# Altium PCB project_buran.PcbDoc
Units mm, origin at the board's own origin, x right, y up, seen from the top; angles counter-clockwise.
Board outline 120 x 100 mm, 2 copper layers (Top Layer, Bottom Layer); 35 components, 51 nets, 202 pads, 0 vias.
Unrouted connection lines stored in the file: 123.
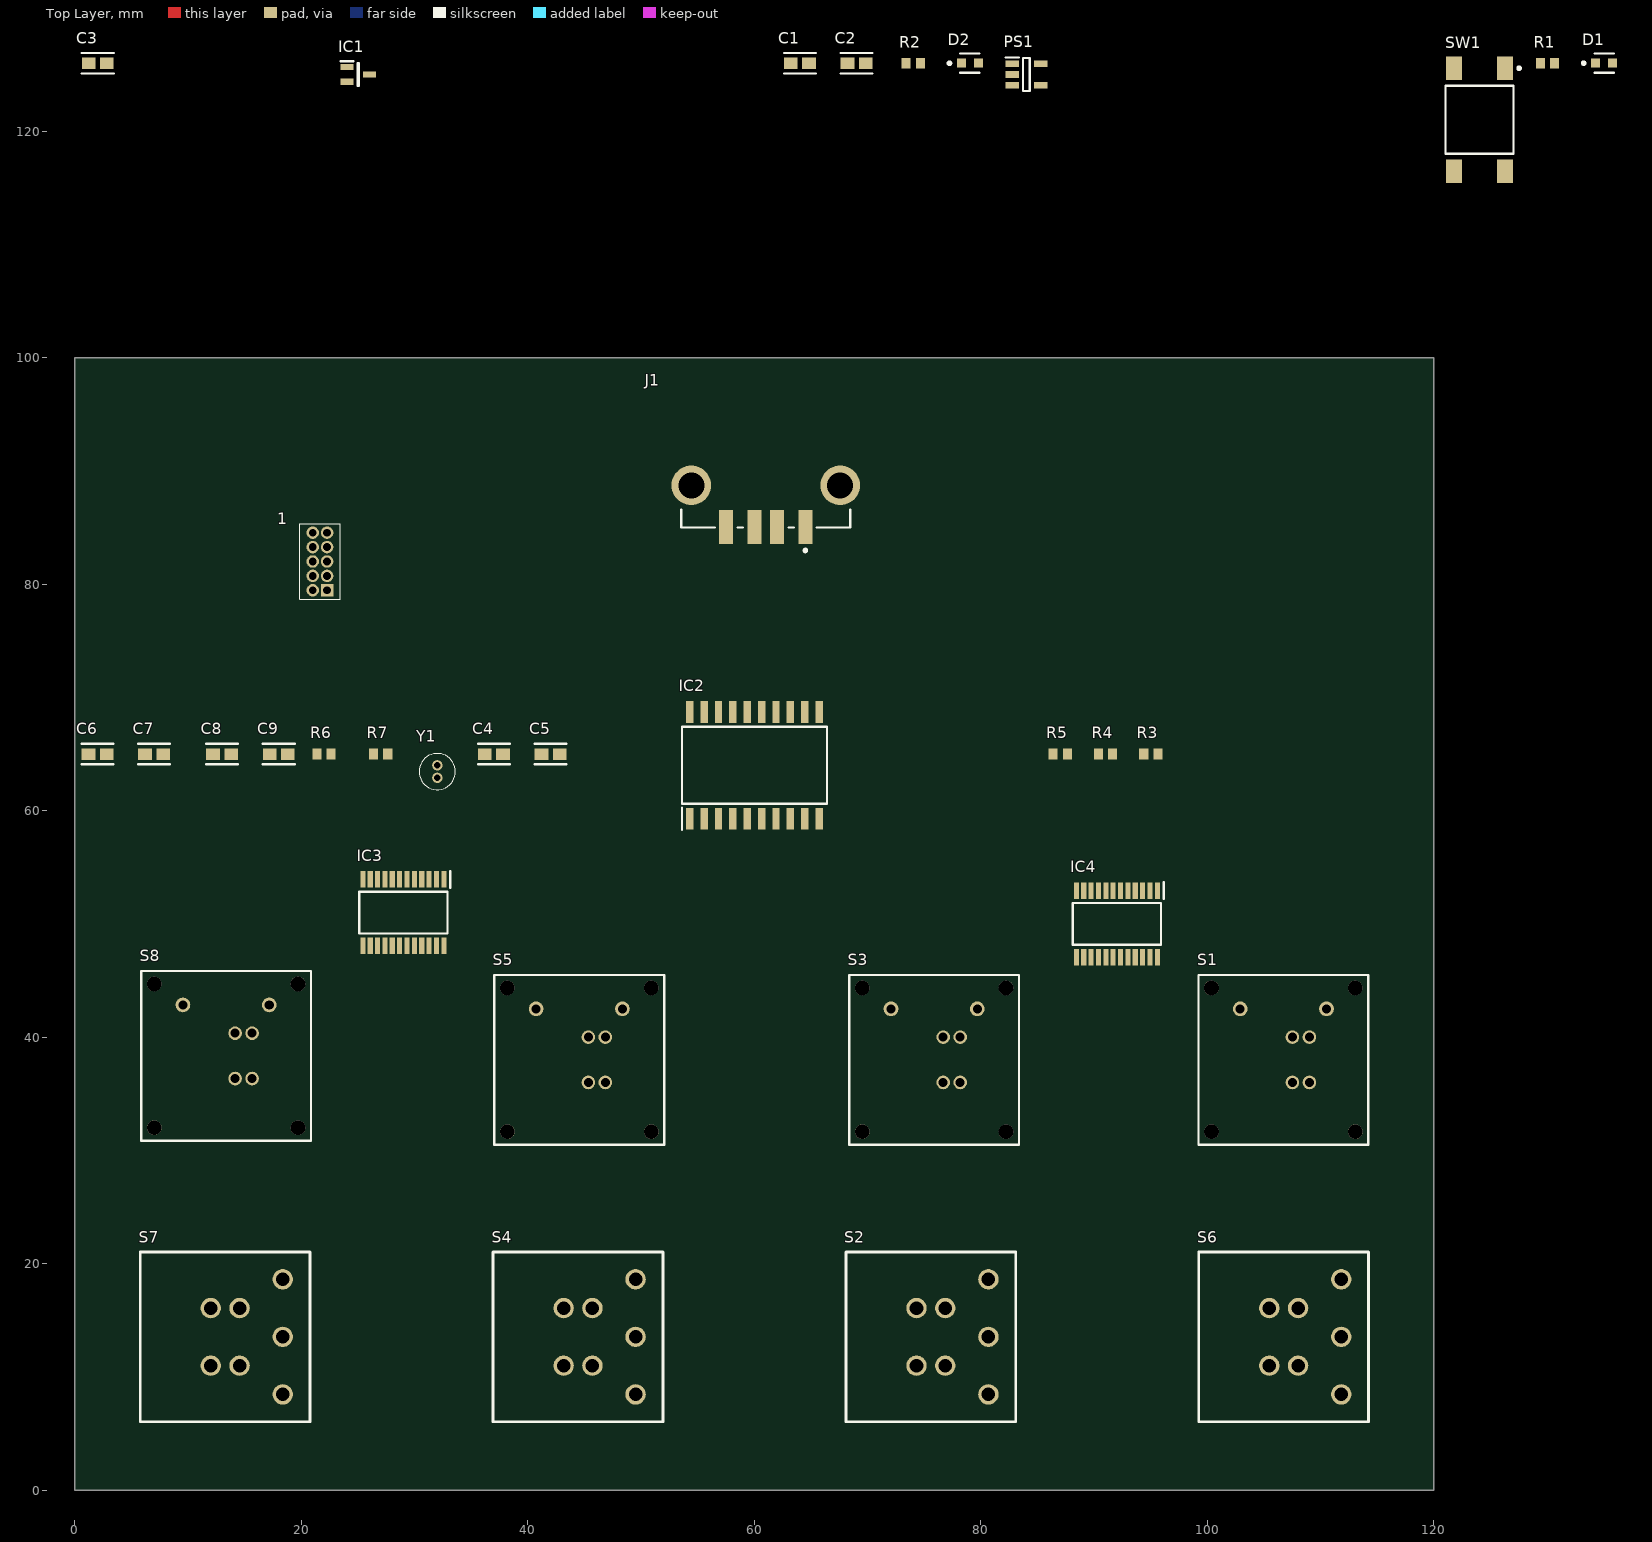
[diagram p0: Top Layer view]
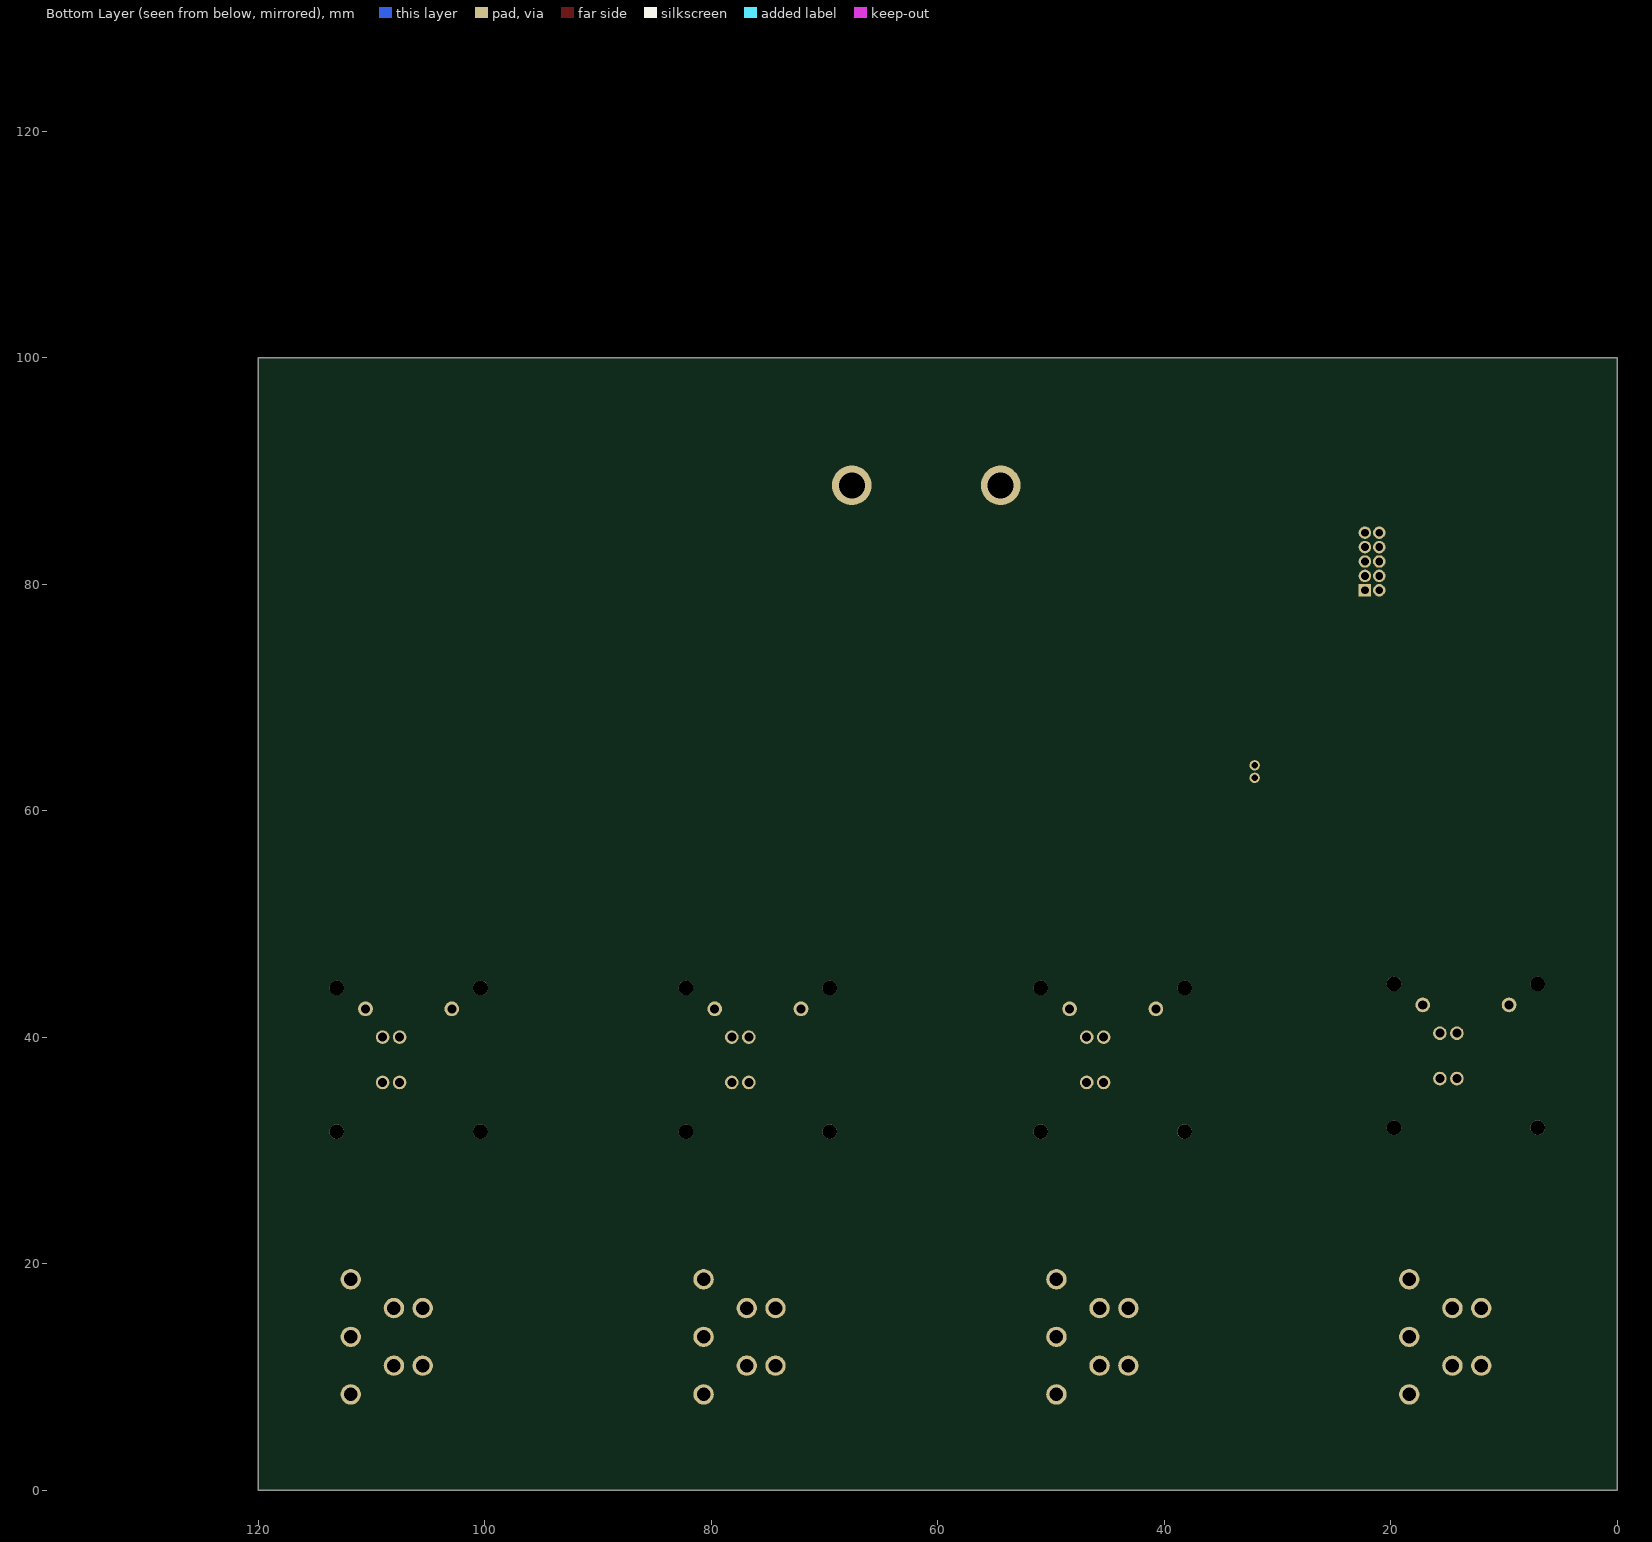
[diagram p1: Bottom Layer view, seen from below]

## Layer stack, top to bottom
Top Solder: solder mask 0.0102, Solder Resist, Dk 3.5
Top Layer: signal copper 0.0356
Dielectric 1: dielectric 0.32, FR-4, Dk 4.8
Bottom Layer: signal copper 0.0356
Bottom Solder: solder mask 0.0102, Solder Resist, Dk 3.5

## Board outline
0,0 120,0 120,100 0,100

## Design rules (kind name [scope] priority, off if disabled: settings)
BoardOutlineClearance [All] p1: gap=0.381 ignorepadtopadclearanceinfootprint=FALSE
Clearance [All] p1: gap=0.152 ignorepadtopadclearanceinfootprint=FALSE except(0: Arc-Hole Track-Hole SMDPad-Hole THPad-Hole Via-Hole Fill-Hole Poly-Hole Region-Hole Text-Hole)
ComponentClearance [All] p1: gap=0.025 collisioncheckmode=3 verticalgap=0.025 showdistances=FALSE
DiffPairsRouting [All] p1: maxlimit=10 minlimit=0.152 mostfreqgap=0.203 toplayer_minwidth=0.152 toplayer_maxwidth=0.381 toplayer_prefwidth=0.203 bottomlayer_minwidth=0.152 bottomlayer_maxwidth=0.381 bottomlayer_prefwidth=0.203 maxuncoupledlength=12.7
HoleSize [All] p1: absolutevalues=TRUE maxlimit=6.731 minlimit=0.33 maxpercent=80.000 minpercent=20.000
HoleToHoleClearance [All] p1: gap=0.254 allowstackedmicrovias=FALSE
MinimumAnnularRing [All] p1: minimumring=0.178
MinimumSolderMaskSliver [All] p1: minsoldermaskwidth=0
PlaneClearance [All] p1: clearance=0.254
PlaneConnect [All] p1: planeconnectstyle=Direct reliefexpansion=0.406 reliefentries=4 reliefconductorwidth=0.152 reliefairgap=0.152
PolygonConnect [All] p1: connectstyle=Relief reliefconductorwidth=0.203 reliefentries=4 polygonreliefangle="90 Angle" airgapwidth=0.152
RoutingCorners [All] p1: cornerstyle=45-Degree minsetback=1.25 maxsetback=1.25
RoutingVias [All] p1: holewidth=0.381 width=0.762 viastyle="Through Hole" minholewidth=0.33 minwidth=0.686 maxholewidth=2.54 maxwidth=2.896
SilkToSilkClearance [All] p1: silktosilkclearance=0
SilkToSolderMaskClearance [IsPad] p1: minsilkscreentomaskgap=0.152 clearancetoexposedcopper=TRUE
SolderMaskExpansion [All] p1: expansion=0.075 istentingtop=FALSE
Width [All] p1: maxlimit=10.16 minlimit=0.152 preferedwidth=0.203
20 further rules are at their usual default settings.

## Classes and differential pairs
differential pair D: +D_P -D_N

## Components (designator, comment, footprint, x,y, rotation, side; value= is the part's Value field where it differs from the comment)
1 "M50-3500542" M503500542 22.27,79.46 r90 top
C1 "1uF" FP-GRM188-0_1-e0_2_0_55-IPC_A 64.018,126 r0 top
C2 "1uF" FP-GRM188-0_1-e0_2_0_55-IPC_A 69.018,126 r0 top
C3 "100nF" FP-GRM188-0_1-e0_2_0_55-IPC_A 2.018,126 r0 top
C4 "100nF" FP-GRM188-0_1-e0_2_0_55-IPC_A 37,65 r0 top
C5 "4.7uF" FP-GRM188-0_1-e0_2_0_55-IPC_A 42,65 r0 top
C6 "1uF" FP-GRM188-0_1-e0_2_0_55-IPC_A 2,65 r0 top
C7 "1uF" FP-GRM188-0_1-e0_2_0_55-IPC_A 7,65 r0 top
C8 "1uF" FP-GRM188-0_1-e0_2_0_55-IPC_A 13,65 r0 top
C9 "1uF" FP-GRM188-0_1-e0_2_0_55-IPC_A 18,65 r0 top
D1 "POWER LED" FP-LTST-C190GKT-MFG 135.018,126 r0 top
D2 "LED 1" FP-LTST-C190GKT-MFG 79.018,126 r0 top
IC1 "MAX803SQ308T1G" SOT65P220X100-3N 25.018,125 r0 top
IC2 "ATSAMD11D14A-SSUT" SOIC127P1032X265-20N 60,64 r90 top
IC3 "LP5012PWR" SOP65P640X120-24N 29,51 r270 top
IC4 "LP5012PWR" SOP65P640X120-24N 92,50 r270 top
J1 "292303-7" FP-292303-7-MFG 61,92 r270 top
PS1 "TLV75733PDBVR" SOT95P280X145-5N 84.018,125 r0 top
R1 "30R" RESC1609X50X30NL10T20 130.018,126 r0 top
R2 "30R" RESC1609X50X30NL10T20 74.018,126 r0 top
R3 "4K7" RESC1609X50X30NL10T20 95,65 r0 top
R4 "10K" RESC1609X50X30NL10T20 91,65 r0 top
R5 "4K7" RESC1609X50X30NL10T20 87,65 r0 top
R6 "2K4" RESC1609X50X30NL10T20 22,65 r0 top
R7 "2K4" RESC1609X50X30NL10T20 27,65 r0 top
S1 "465M111172501" 465M111172501 106.7,38 r0 top
S2 "PB26-13M-B-WT-RGB-N" "PCBCOMPONENT_1 - DUPLICATE" 68.007,5.84 r0 top
S3 "465M111172501" 465M111172501 75.867,38 r0 top
S4 "PB26-13M-B-WT-RGB-N" "PCBCOMPONENT_1 - DUPLICATE" 36.853,5.84 r0 top
S5 "465M111172501" 465M111172501 44.533,38 r0 top
S6 "PB26-13M-B-WT-RGB-N" "PCBCOMPONENT_1 - DUPLICATE" 99.16,5.84 r0 top
S7 "PB26-13M-B-WT-RGB-N" "PCBCOMPONENT_1 - DUPLICATE" 5.7,5.84 r0 top
S8 "465M111172501" 465M111172501 13.35,38.35 r0 top
SW1 "FSM4JSMA" TECO-FSM4JSMA_V 124.018,121 r0 top
Y1 "AB38T-32.768KHZ" AB38T32768KHZ 32,64 r0 top

## Footprints (in the part's own frame and the unit in brackets; to place one, negate y for a bottom-side part, rotate by r counter-clockwise, add the part's x,y. Pads: shape width x height; smd on the part's side, far side on the other; paste and mask are expansions set on the pad)
465M111172501 [mm] "15x15mm THT Push Button Switch with integrated LED RGB"
  round 1.3 hole 0.8: 1(-3.81,4.5) 2(3.81,4.5)
  round 1.2 hole 0.8: L1(0.8,-2) L2(2.3,-2) L3(2.3,2) LC(0.8,2)
  round 1.3 hole 1.3 unplated: MH1(-6.35,-6.35) MH2(-6.35,6.35) MH3(6.35,6.35) MH4(6.35,-6.35)
  silkscreen extent -7.5,-7.5 7.5,7.5, body extent -7.5,-7.5 7.5,7.5, height 19.55
AB38T32768KHZ [mm]
  round 0.91 hole 0.55: 1(0,0) 2(0,-1.1)
  silkscreen extent -1.6,-2.15 1.6,1.05, body extent -1.6,-2.15 1.6,1.05, height 8.4
FP-292303-7-MFG [mm]
  rect 3x1.25 smd paste+0 mask+0: 1(6.96,3.5) 2(6.96,1) 3(6.96,-1) 4(6.96,-3.5)
  round 3.5 hole 2.3 paste-1000 mask+0: 5(3.28,6.57) 6(3.28,-6.57)
  silkscreen extent 5.4,-7.47 9.15,7.47, body extent -7.1,-8.42 8.56,8.42, height 0.25
FP-GRM188-0_1-e0_2_0_55-IPC_A [mm]
  rect 1.208x1.012 smd paste+0 mask+0: 1(-0.802,0) 2(0.802,0)
  silkscreen extent -1.41,-0.91 1.41,0.91, body extent -1.91,-1.01 1.91,1.01, height 0.25
FP-LTST-C190GKT-MFG [mm]
  rect 0.8x0.8 smd paste+0 mask+0: 1(-0.75,0) 2(0.75,0)
  silkscreen extent -1.92,-0.85 0.85,0.85, body extent -1.25,-0.55 1.25,0.55, height 0.25
M503500542 [mm]
  rect 1.1x1.1 hole 0.7: 1(0,0)
  round 1.1 hole 0.7: 2(0,1.27) 3(1.27,0) 4(1.27,1.27) 5(2.54,0) 6(2.54,1.27) 7(3.81,0) 8(3.81,1.27) 9(5.08,0) 10(5.08,1.27)
  silkscreen extent -0.78,-1.14 5.86,2.41, body extent -0.63,-1.06 5.72,2.34, height 3.95
"PCBCOMPONENT_1 - DUPLICATE" [mm]
  round 1.8 hole 1.2: COM(12.65,2.62) L1(8.84,10.24) L2(8.84,5.16) L3(6.3,5.16) L4(6.3,10.24) NC(12.65,12.78) NO(12.65,7.7)
  silkscreen extent 0.07,0.2 15.07,15.2
RESC1609X50X30NL10T20 [mm] "Chip Resistor, 2-Leads, Body 1.55x0.85mm, IPC Medium Density"
  rect 0.8x0.95 smd: 1(-0.625,0) 2(0.625,0)
  body extent -0.82,-0.48 0.82,0.48, height 0.5
SOIC127P1032X265-20N [mm]
  rect 1.925x0.65 smd: 1(-4.712,5.715) 2(-4.712,4.445) 3(-4.712,3.175) 4(-4.712,1.905) 5(-4.712,0.635) 6(-4.712,-0.635) 7(-4.712,-1.905) 8(-4.712,-3.175) 9(-4.712,-4.445) 10(-4.712,-5.715) 11(4.712,-5.715) 12(4.712,-4.445) 13(4.712,-3.175) 14(4.712,-1.905) 15(4.712,-0.635) 16(4.712,0.635) 17(4.712,1.905) 18(4.712,3.175) 19(4.712,4.445) 20(4.712,5.715)
  silkscreen extent -5.68,-6.4 3.4,6.4, body extent -5.16,-6.4 5.16,6.4, height 2.65
SOP65P640X120-24N [mm]
  rect 1.475x0.45 smd: 1(-2.938,3.575) 2(-2.938,2.925) 3(-2.938,2.275) 4(-2.938,1.625) 5(-2.938,0.975) 6(-2.938,0.325) 7(-2.938,-0.325) 8(-2.938,-0.975) 9(-2.938,-1.625) 10(-2.938,-2.275) 11(-2.938,-2.925) 12(-2.938,-3.575) 13(2.938,-3.575) 14(2.938,-2.925) 15(2.938,-2.275) 16(2.938,-1.625) 17(2.938,-0.975) 18(2.938,-0.325) 19(2.938,0.325) 20(2.938,0.975) 21(2.938,1.625) 22(2.938,2.275) 23(2.938,2.925) 24(2.938,3.575)
  silkscreen extent -3.67,-3.9 1.85,4.15, body extent -3.2,-3.9 3.2,3.9, height 1.2
SOT65P220X100-3N [mm]
  rect 1.15x0.55 smd: 1(-1,0.65) 2(-1,-0.65) 3(1,0)
  silkscreen extent -1.58,-1 0.08,1.17, body extent -1.1,-1 1.1,1, height 1
SOT95P280X145-5N [mm]
  rect 1.2x0.6 smd: 1(-1.25,0.95) 2(-1.25,0) 3(-1.25,-0.95) 4(1.25,-0.95) 5(1.25,0.95)
  silkscreen extent -1.85,-1.45 0.3,1.5, body extent -1.4,-1.45 1.4,1.45, height 1.45
TECO-FSM4JSMA_V [mm] "SMD, 4-Leads, Body 6x6mm, Pitch 4.5mm"
  rect 1.4x2.1 smd: 1(2.25,4.55) 2(2.25,-4.55) 3(-2.25,4.55) 4(-2.25,-4.55)
  silkscreen extent -3,-3 3.63,4.67, body extent -3,-5 3,5, height 5.08

## Part data
1: "Connector", Manufacturer_Name=Harwin, Mouser Part Number=855-M50-3500542, Datasheet Link=http://docs-emea.rs-online.com/webdocs/13d4/0900766b813d4011.pdf, Height=4.15mm, Manufacturer_Part_Number=M50-3500542, Mouser Price/Stock=https://www.mouser.co.uk/ProductDetail/Harwin/M50-3500542?qs=9fQaSFfsqsyXI0P9tFOVoQ%3D%3D
C1 C2 C3 C4 C5 C6 C7 C8 C9: library part CMP-2006-02792-2, "Chip Multilayer Ceramic Capacitors for General Purpose, 0603, 10uF, X5R, 15%, 20%, 6.3V", Capacitance=10uF, Case Code (Imperial)=0603, Case Code (Metric)=1608, Dielectric=X5R, Max Operating Temperature=85°C, Min Operating Temperature=-55°C, Package Quantity=4000, Tolerance=20%, Voltage=6.3V, Case/Package=0603, Depth=0.8mm, Height=0.8mm, Lead Free="Lead Free", Length=1.6mm, Material=Ceramic, Mount="Surface Mount", Packaging="Tape and Reel", Radiation Hardening=No, REACH SVHC="No SVHC", Termination=SMD/SMT, Thickness=0.035inch, Voltage Rating=6.3V, Voltage Rating (DC)=6.3V, Width=0.031inch
D1 D2: library part CMP-22017-000005-2, "LED GREEN CLEAR CHIP SMD", Case Code (Imperial)=0603, Case Code (Metric)=1608, Color=Green, Forward Current=30mA, Forward Voltage=2.1V, Lens Color=Colorless, Max Operating Temperature=85°C, Min Operating Temperature=-55°C, Package Quantity=1, Power Dissipation=100mW, Reverse Voltage=5V, Test Current=10mA, Voltage=2V, Case/Package=0603, Depth=0.8mm, Dominant Wavelength=569nm, Height=0.8mm, Illumination Color=Green, Lead Free="Lead Free", Length=1.6mm, Lens Style=Clear, Lens Transparency=Clear, Luminous Intensity=6mcd, Mount="Surface Mount", Number of Elements=1, Number of LEDs=1, Number of Pins=2, Packaging="Tape and Reel", Power Rating=100mW, Radiation Hardening=No, Viewing Angle=130°, Wavelength=565nm, Width=0.8mm
IC1: "Integrated Circuit", Manufacturer_Name="ON Semiconductor", Mouser Part Number=863-MAX803SQ308T1G, Arrow Part Number=MAX803SQ308T1G, Arrow Price/Stock=https://www.arrow.com/en/products/max803sq308t1g/on-semiconductor, Datasheet Link=http://www.onsemi.com/pub/Collateral/MAX803-D.PDF, Height=1mm, Manufacturer_Part_Number=MAX803SQ308T1G, Mouser Price/Stock=https://www.mouser.co.uk/ProductDetail/ON-Semiconductor/MAX803SQ308T1G?qs=aSUclzrs14xj4ys5ck7Tew%3D%3D
IC2: "Integrated Circuit", Manufacturer_Name=Microchip, Mouser Part Number=556-ATSAMD11D14ASSUT, Arrow Part Number=ATSAMD11D14A-SSUT, Arrow Price/Stock=https://www.arrow.com/en/products/atsamd11d14a-ssut/microchip-technology, Datasheet Link=http://ww1.microchip.com/downloads/en/devicedoc/atmel-42363-sam-d11_datasheet.pdf, Height=2.65mm, Manufacturer_Part_Number=ATSAMD11D14A-SSUT, Mouser Price/Stock=https://www.mouser.co.uk/ProductDetail/Microchip-Technology-Atmel/ATSAMD11D14A-SSUT/?qs=lrqjml%252Bjt8f8EFewxXrzCw%3D%3D
IC3 IC4: "Integrated Circuit", Manufacturer_Name="Texas Instruments", Mouser Part Number=595-LP5012PWR, Datasheet Link=https://www.ti.com/lit/ds/symlink/lp5012.pdf?ts=1615929314042&ref_url=https%253A%252F%252Fwww.mouser.co.uk%252F, Height=1.2mm, Manufacturer_Part_Number=LP5012PWR, Mouser Price/Stock=https://www.mouser.co.uk/ProductDetail/Texas-Instruments/LP5012PWR/?qs=T94vaHKWudSL6jLwBy12Hg%3D%3D
J1: library part CMP-03360-000008-1, "CONN RCPT USB2.0 TYPEA 4P SMD RA", Current Rating=1A, Manufacturer="TE Connectivity", Temperature="-55°C to +85°C", Temperature Range High=+85°C, Temperature Range Low=-55°C, Voltage Rating=30V, Automotive=No, Category=Conn, ComponentLink2Description=Datasheet, ComponentLink2URL=https://www.te.com/usa-en/product-292303-7.html?te_bu=Cor&te_type=other&te_campaign=oct_glo_cor-oct-global-oth-prtnr-fy19-oct-octo-buy-bom_sma-298_2&elqCampaignId=35216, Conn Orientation="Right Angle", Contact Material=Gold,Nickel, Device Class L1=Connectors, Device Class L2="USB Connectors", Device Class L3=unset, Digikey Description="CONN RCPT USB2.0 TYPEA 4P SMD RA", Is Female=yes, Lead Free=Yes, Manufacturer Part Number=292303-7, Mouser Description="USB Connectors USB A R/A Recpt Assy SMT", Number Of Contacts=4, Octopart=https://octopart.com/292303-7-te+connectivity-42840369, Package=292303-7, RoHS=TRUE, Shielding=true, Usb Standard="USB 2.0"
PS1: "Power Supply", Manufacturer_Name="Texas Instruments", Mouser Part Number=595-TLV75733PDBVR, Arrow Part Number=TLV75733PDBVR, Arrow Price/Stock=https://www.arrow.com/en/products/tlv75733pdbvr/texas-instruments, Datasheet Link=http://www.ti.com/lit/gpn/tlv757p, Height=1.45mm, Manufacturer_Part_Number=TLV75733PDBVR, Mouser Price/Stock=https://www.mouser.co.uk/ProductDetail/Texas-Instruments/TLV75733PDBVR?qs=y6ZabgHbY%252BwAAzSntTW34w%3D%3D
R1 R2 R3 R4 R5 R6 R7: library part CMP-2000-03854-1, Manufacturer="Vishay Dale", Part Number=CRCW0603110RFKEA
S1 S3 S5 S8: "WS-PBTL Illuminated THT Push Button Switch, Red & Green & Blue", Emitting Color="Red & Green & Blue", Operating Temperature="-40 to +85degC", Rated Current=100mA, Rated Voltage=12VDC, ComponentLink1Description=Manufacturer, ComponentLink1URL=http://www.we-online.de, ComponentLink2Description=Datasheet, ComponentLink2URL=https://katalog.we-online.com/em/datasheet/465M111172501.pdf, Contact Material="Copper Alloy", Contact Plating=Gold, Mounting Technology=THT, Operation Force=200gf, Packaging="ESD Tray", Part Number=465M111172501, Published Date="September 2019", Publisher="Wurth Elektronik", Size=15x15mm, Terminal Material="Copper Alloy", Terminal Plating=Tin
S2 S4 S6 S7: "WS-PBTL Illuminated THT Push Button Switch, Red & Green & Blue", Emitting Color="Red & Green & Blue", Operating Temperature="-40 to +85degC", Part Number=465M111172501, Rated Current=100mA, Rated Voltage=12VDC, ComponentLink1Description=Manufacturer, ComponentLink1URL=http://www.we-online.de, ComponentLink2Description=Datasheet, ComponentLink2URL=https://katalog.we-online.com/em/datasheet/465M111172501.pdf, Contact Material="Copper Alloy", Contact Plating=Gold, Mounting Technology=THT, Operation Force=200gf, Packaging="ESD Tray", Published Date="September 2019", Publisher="Wurth Elektronik", Size=15x15mm, Terminal Material="Copper Alloy", Terminal Plating=Tin
SW1: library part CMP-2000-05602-2, "Swicth, SPST, 24 V, -35 to 85 degC, 4-Pin SMD, RoHS, Tape and Reel", Case\/Package=SMD/SMT, Contact Current Rating=50mA, Contact Resistance=100mOhm, Manufacturer="TE Connectivity", Max Operating Temperature=85degC, Max Voltage Rating (DC)=12V, Min Operating Temperature=-35degC, Operating Force=1.57N, Package Description="4-Pin Surface Mount Device, Body 6 x 6 mm, Pitch 4.5 mm", Package Quantity=750, Voltage Rating=24V, Actuator Length=0.055inch, Actuator Material=Polyamide, Contact Material=CopperAlloy, Contact Plating=Silver, Current Rating=50mA, Datasheet URL=http://www.te.com/commerce/DocumentDelivery/DDEController?Action=showdoc&DocId=Customer+Drawing%7F2-1437565-7%7FV%7Fpdf%7FEnglish%7FENG_CD_2-1437565-7_V.pdf%7F4-1437565-2, Datasheet Version="Rev. V, 02/2015", Electrical Life=100000Cycles, Illumination Type=Illuminated, Length=6mm, Manufacturer URL=http://www.te.com/, Mechanical Life=100000Cycles, Mount=SurfaceMount, Mounting Technology=SurfaceMount, Orientation=Straight, Package Reference=FSM4JSMA, Packaging=LoosePiece, REACH SVHC=Unknown, RoHSCompliant=true, Switch Travel=0.25mm, Termination=GullWing, Throw Configuration=SPST, Voltage Rating (DC)=24V, Width=6mm
Y1: "Crystal or Oscillator", Manufacturer_Name=ABRACON, Mouser Part Number=815-AB38T-32.768KHZ, Arrow Part Number=AB38T-32.768KHZ, Arrow Price/Stock=https://www.arrow.com/en/products/ab38t-32.768khz/abracon, Datasheet Link=http://www.abracon.com/Resonators/AB38T.pdf, Height=8.3mm, Manufacturer_Part_Number=AB38T-32.768KHZ, Mouser Price/Stock=https://www.mouser.co.uk/ProductDetail/ABRACON/AB38T-32768KHZ/?qs=m%252BUhWDcpCfbdp9ovMbeW3g%3D%3D

## Nets (pads, with @x,y where several pads share a name; then routed paths per layer and width w, separated by ;. In a path a pad name is that pad's centre, name@x,y a point inside that pad or via, vN(x,y) a via of type N, cw(c..) or ccw(c..) an arc to the next point about the centre after c; other vN are vias at no path point)
/RESET: 1.10 IC1.2 IC2.11 R4.1 SW1.1
D_N: IC2.14 J1.2
D_P: IC2.15 J1.3
GND: 1.3 1.5 C1.2 C2.2 C3.2 C4.2 C5.2 C6.2 C7.2 C8.2 C9.2 D1.1 D2.1 IC1.1 IC2.16 IC3.1 IC3.2 IC3.3 IC3.6 IC3.18 IC4.1 IC4.2 IC4.6 IC4.18 J1.4 J1.5 J1.6 PS1.2 R6.1 R7.1 S1.2 S2.NO S3.2 S4.NO S5.2 S6.NO S7.NO S8.2 SW1.3 SW1.4
LED_OUT_1: IC2.9 R2.2
NetC7_1: C7.1 IC3.10
NetC9_1: C9.1 IC4.10
NetD1_2: D1.2 R1.1
NetD2_2: D2.2 R2.1
NetIC3_9: IC3.9 R6.2
NetIC4_9: IC4.9 R7.2
OUT0: IC3.12 S1.L1
OUT1: IC3.13 S1.L2
OUT2: IC3.14 S1.L3
OUT3: IC3.15 S3.L1
OUT4: IC3.16 S3.L2
OUT5: IC3.17 S3.L3
OUT6: IC3.19 S5.L1
OUT7: IC3.20 S5.L2
OUT8: IC3.21 S5.L3
OUT9: IC3.22 S8.L1
OUT10: IC3.23 S8.L2
OUT11: IC3.24 S8.L3
OUT12: IC4.12 S2.L1
OUT13: IC4.13 S2.L4
OUT14: IC4.14 S2.L3
OUT15: IC4.15 S4.L1
OUT16: IC4.16 S4.L4
OUT17: IC4.17 S4.L3
OUT18: IC4.19 S6.L1
OUT19: IC4.20 S6.L4
OUT20: IC4.21 S6.L3
OUT21: IC4.22 S7.L1
OUT22: IC4.23 S7.L4
OUT23: IC4.24 S7.L3
SCL: IC2.7 IC3.7 IC4.7 R5.1
SDA: IC2.6 IC3.5 IC4.5 R3.1
SW0: IC2.1 S1.1
SW1: IC2.2 S3.1
SW2: IC2.3 S5.1
SW3: IC2.8 S8.1
SW4: IC2.10 S2.COM
SW5: IC2.18 S4.COM
SW6: IC2.19 S6.COM
SW7: IC2.20 S7.COM
SWCLK: 1.4 IC2.12
SWDIO: 1.2 IC2.13
V_UNREG: C1.1 J1.1 PS1.1 PS1.3
VCC: 1.1 C2.1 C3.1 C4.1 C5.1 C6.1 C8.1 IC1.3 IC2.17 IC3.4 IC3.8 IC4.3 IC4.4 IC4.8 PS1.5 R1.2 R3.2 R4.2 R5.2 S1.LC S2.L2 S3.LC S4.L2 S5.LC S6.L2 S7.L2 S8.LC
XIN32: IC2.4 Y1.1
XOUT32: IC2.5 Y1.2
pads on no net: 1.6 1.7 1.8 1.9 IC3.11 IC4.11 PS1.4 S1.MH1 S1.MH2 S1.MH3 S1.MH4 S2.NC S3.MH1 S3.MH2 S3.MH3 S3.MH4 S4.NC S5.MH1 S5.MH2 S5.MH3 S5.MH4 S6.NC S7.NC S8.MH1 S8.MH2 S8.MH3 S8.MH4 SW1.2